# Altium PCB SPI_Board.PcbDoc (part 2 of 2)
Units mil, origin at the board's own origin, x right, y up, seen from the top; angles counter-clockwise.
Board outline 3600 x 5100 mil, 2 copper layers (Top Layer, Bottom Layer); 50 components, 221 nets, 541 pads, 190 vias.
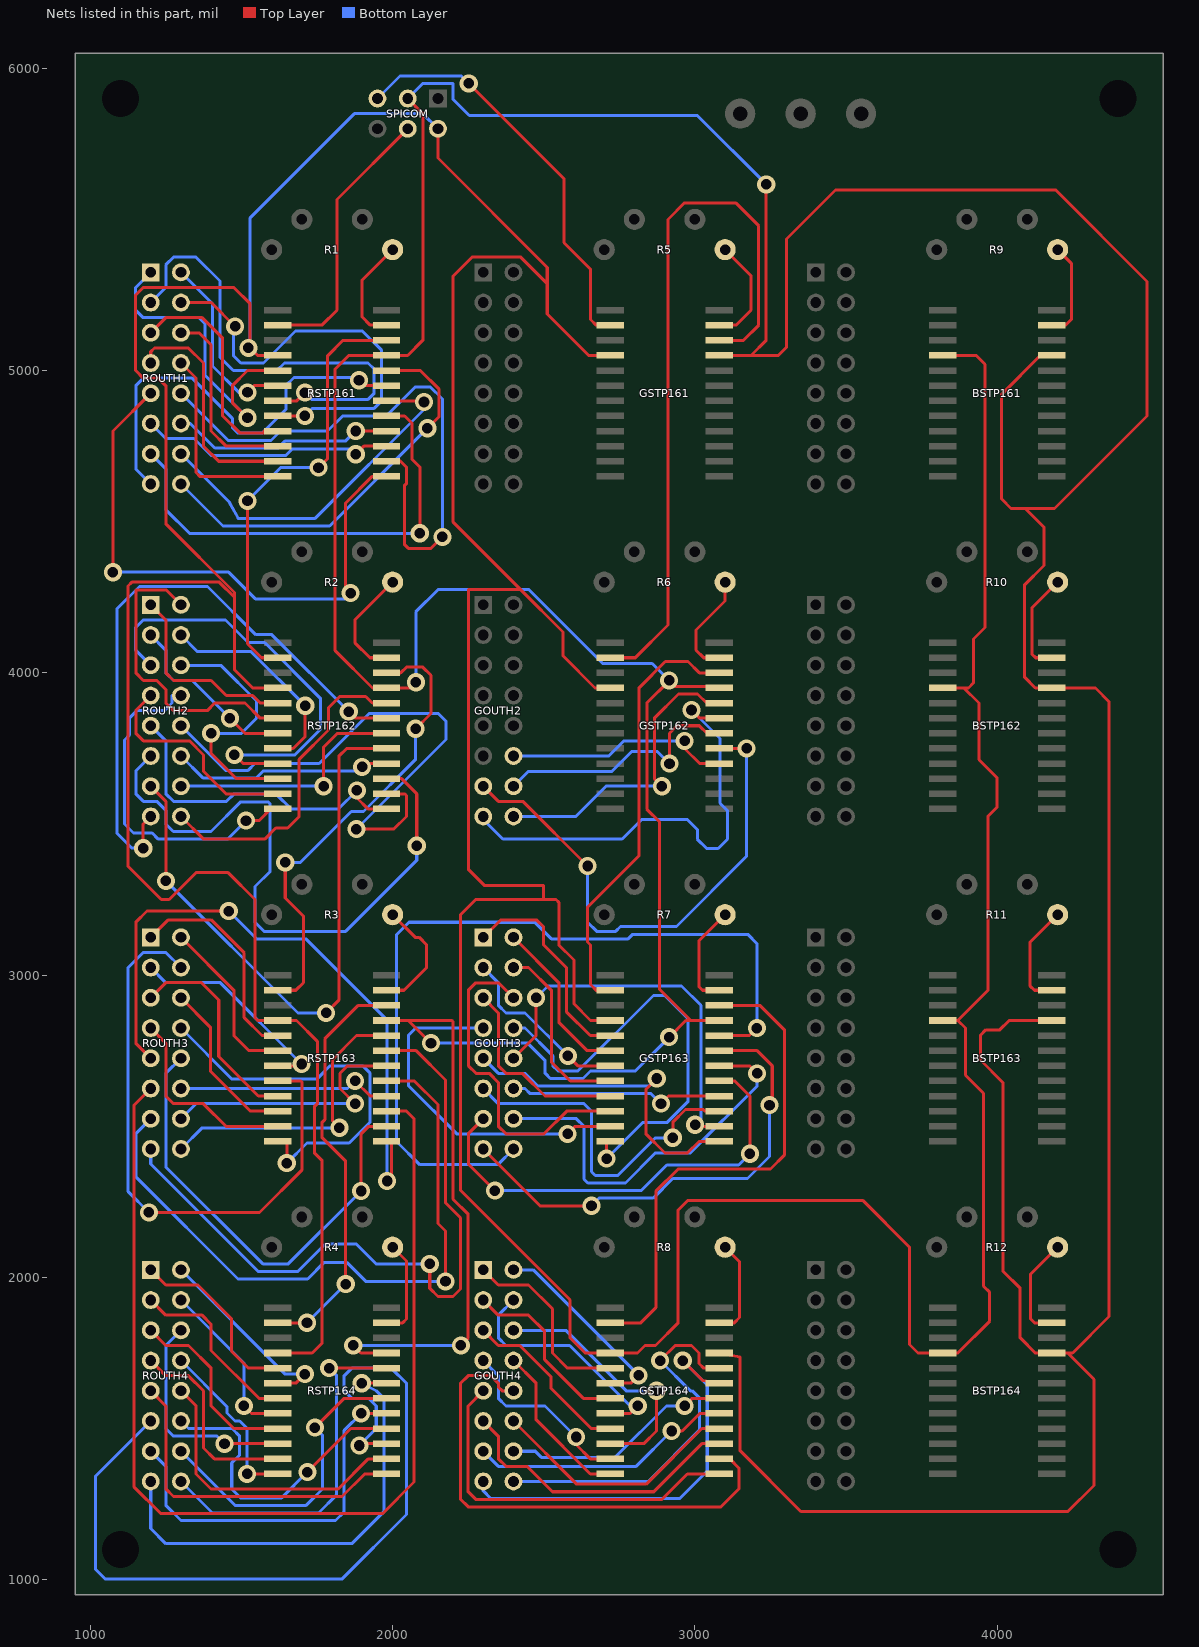
[diagram p2: the nets of this part, all layers, seen from the top]

## Via types
v1: diameter 60, hole 35, Top Layer to Bottom Layer, 190 vias

## Nets (pads, with @x,y where several pads share a name; then routed paths per layer and width w, separated by ;. In a path a pad name is that pad's centre, name@x,y a point inside that pad or via, vN(x,y) a via of type N, cw(c..) or ccw(c..) an arc to the next point about the centre after c; other vN are vias at no path point) (continued)
GOUT27: GOUTH2.12 GSTP162.16 | length 746.5
  Top Layer w10: v1(2966,3775) 2966,3750 3016,3700 GSTP162.16@3080.12,3700
  Bottom Layer w10: GOUTH2.12@2400,3725 2715.25,3725 2765.25,3775 v1(2966,3775)
GOUT28: GOUTH2.13 GSTP162.17 | length 1729.4
  Top Layer w10: GOUTH2.13@2300,3625 2350,3575 2431,3575 v1(2645,3361) ; GSTP162.17@3080.12,3750 v1(3171,3750)
  Bottom Layer w10: v1(2645,3361) 2645,3175 2675,3145 2738,3145 2754,3161 2939,3161 3171,3393 v1(3171,3750)
GOUT29: GOUTH2.14 GSTP162.18 | length 865
  Top Layer w10: v1(2916,3700) 2916,3800 2941,3825 3015,3825 3040,3800 GSTP162.18@3080.12,3800
  Bottom Layer w10: GOUTH2.14@2400,3625 2448,3673 2724,3673 2791,3740 2876,3740 v1(2916,3700)
GOUT30: GOUTH2.15 GSTP162.19 | length 1521.3
  Top Layer w10: v1(2989,3877) 3016,3850 GSTP162.19@3080.12,3850
  Bottom Layer w10: GOUTH2.15@2300,3525 2300,3515.12 2364.64,3450.47 2759.47,3450.47 2824,3515 2975,3515 3008,3482 3008,3450 3039,3419 3077,3419 3108,3450 3108,3544 3083,3569 3083,3783 v1(2989,3877)
GOUT31: GOUTH2.16 GSTP162.20 | length 1027.5
  Top Layer w10: v1(2891,3625) 2866,3650 2866,3850 2946,3930 3009,3930 3039,3900 GSTP162.20@3080.12,3900
  Bottom Layer w10: GOUTH2.16@2400,3525 2606,3525 2706,3625 v1(2891,3625)
GOUT32: GOUTH3.1 GSTP163.5 | length 721.8
  Top Layer w10: GOUTH3.1@2300,3125 2357,3182 2477,3182 2500,3159 2500,3100 2575,3025 2575,2879 2654,2800 GSTP163.5@2719.88,2800
GOUT33: GOUTH3.2 GSTP163.6 | length 552.1
  Top Layer w10: GOUTH3.2@2400,3125 2550,2975 2550,2843.7 2643.7,2750 GSTP163.6@2719.88,2750
GOUT34: GOUTH3.3 GSTP163.7 | length 598.4
  Top Layer w10: v1(2580,2733) 2613,2700 GSTP163.7@2719.88,2700
  Bottom Layer w10: GOUTH3.3@2300,3025 2350,2975 2350,2900 2375,2875 2438,2875 v1(2580,2733)
GOUT35: GOUTH3.4 GSTP163.8 | length 614
  Top Layer w10: GOUTH3.4@2400,3025 2450,3025 2525,2950 2525,2713 2588,2650 GSTP163.8@2719.88,2650
GOUT36: GOUTH3.5 GSTP163.9 | length 657
  Top Layer w10: GOUTH3.5@2300,2925 2350,2875 2350,2700 2375,2675 2429,2675 2504,2600 GSTP163.9@2719.88,2600
GOUT37: GOUTH3.6 GSTP163.10 | length 1108.5
  Top Layer w10: GOUTH3.6@2400,2925 2350.47,2974.53 2275,2974.53 2250.47,2950 2250.47,2700.53 2276,2675 2320.04,2675 2350,2645.04 2350,2500 2375,2475 2501,2475 2576,2550 GSTP163.10@2719.88,2550
GOUT38: GOUTH3.7 GSTP163.11 | length 1167.9
  Top Layer w10: v1(2579,2475) 2604,2500 GSTP163.11@2719.88,2500
  Bottom Layer w10: GOUTH3.7@2300,2825 2077,2825 2052,2800 2052,2635 2212,2475 v1(2579,2475)
GOUT39: GOUTH3.8 GSTP163.12 | length 1481.7
  Top Layer w10: v1(2708,2393) 2708,2450 GSTP163.12@2719.88,2450
  Bottom Layer w10: GOUTH3.8@2400,2825 2438,2825 2530,2733 2530,2700 2547,2683 2613,2683 2863,2933 2900,2933 2978,2855 2978,2582.83 2907.17,2512 2827,2512 v1(2708,2393)
GOUT40: GOUTH3.9 GSTP163.13 | length 1104.6
  Top Layer w10: v1(2874,2658) 2838,2622 2838,2475.12 2901.51,2411.62 2975,2411.62 3013.38,2450 GSTP163.13@3080.12,2450
  Bottom Layer w10: GOUTH3.9@2300,2725 2350,2675 2438,2675 2480,2633 2849,2633 v1(2874,2658)
GOUT41: GOUTH3.10 GSTP163.14 | length 1302.8
  Top Layer w10: GOUTH3.10@2400,2725 2475,2800 v1(2475,2925) ; v1(3001,2505) 3006,2500 GSTP163.14@3080.12,2500
  Bottom Layer w10: v1(2475,2925) 2514,2964 2956,2964 3020,2900 3020,2524 v1(3001,2505)
GOUT42: GOUTH3.11 GSTP163.15 | length 1139.6
  Top Layer w10: v1(2927,2462) 2927,2513.5 2969.33,2555.83 3028.17,2555.83 3034,2550 GSTP163.15@3080.12,2550
  Bottom Layer w10: GOUTH3.11@2300,2625 2350,2575 2633,2575 2658,2550 2658,2350 2670.78,2337.22 2745.33,2337.22 2870.11,2462 v1(2927,2462)
GOUT43: GOUTH3.12 GSTP163.16 | length 711.2
  Top Layer w10: v1(2888,2575) 2913,2600 GSTP163.16@3080.12,2600
  Bottom Layer w10: GOUTH3.12@2400,2625 2438,2625 2455,2608 2855,2608 v1(2888,2575)
GOUT44: GOUTH3.13 GSTP163.17 | length 1502.4
  Top Layer w10: GOUTH3.13@2300,2525 2250.47,2475.47 2250.47,2375 v1(2338.25,2287.22) ; GSTP163.17@3080.12,2650 3132,2650 3182,2600 v1(3182,2409)
  Bottom Layer w10: v1(2338.25,2287.22) 2822.67,2287.22 2907.32,2371.87 3144.87,2371.87 v1(3182,2409)
GOUT45: GOUTH3.14 GSTP163.18 | length 1307.8
  Top Layer w10: GSTP163.18@3080.12,2700 3181,2700 v1(3206,2675)
  Bottom Layer w10: GOUTH3.14@2400,2525 2608,2525 2633,2500 2633,2325 2645.78,2312.22 2770.22,2312.22 2870,2412 2985,2412 3206,2633 v1(3206,2675)
GOUT46: GOUTH3.15 GSTP163.19 | length 1592.7
  Top Layer w10: GOUTH3.15@2300,2425 2488,2237 v1(2658,2237) ; GSTP163.19@3080.12,2750 3206,2750 3256,2700 3256,2579 v1(3247,2570)
  Bottom Layer w10: v1(2658,2237) 2683.22,2262.22 2862.22,2262.22 2927,2327 3174,2327 3247,2400 v1(3247,2570)
GOUT47: GOUTH3.16 GSTP163.20 | length 2790.1
  Top Layer w10: GSTP163.20@3080.12,2800 3180,2800 v1(3205,2825)
  Bottom Layer w10: GOUTH3.16@2400,2425 2348,2373 2090,2373 2013,2450 2013,3134 2054,3175 2470,3175 2525,3120 2779.29,3120 2794.29,3135 3175,3135 3205,3105 v1(3205,2825)
GOUT48: GOUTH4.1 GSTP164.5 | length 640
  Top Layer w10: GOUTH4.1@2300,2025 2350,1975 2450,1975 2529,1896 2529,1750 2579,1700 GSTP164.5@2719.88,1700
GOUT49: GOUTH4.2 GSTP164.6 | length 663.4
  Top Layer w10: GSTP164.6@2719.88,1650 2788,1650 v1(2814,1676)
  Bottom Layer w10: GOUTH4.2@2400,2025 2465,2025 v1(2814,1676)
GOUT50: GOUTH4.3 GSTP164.7 | length 609.6
  Top Layer w10: GOUTH4.3@2300,1925 2350,1875 2450,1875 2503.15,1821.85 2503.15,1727.85 2631,1600 GSTP164.7@2719.88,1600
GOUT51: GOUTH4.4 GSTP164.8 | length 801.4
  Top Layer w10: GSTP164.8@2719.88,1550 2786,1550 v1(2811,1575)
  Bottom Layer w10: GOUTH4.4@2400,1925 2350,1875 2350,1800 2375,1775 2586,1775 2786,1575 v1(2811,1575)
GOUT52: GOUTH4.5 GSTP164.9 | length 577.1
  Top Layer w10: GOUTH4.5@2300,1825 2350,1775 2420.64,1775 2524.73,1670.91 2524.73,1632.27 2657,1500 GSTP164.9@2719.88,1500
GOUT53: GOUTH4.6 GSTP164.10 | length 859.4
  Top Layer w10: GSTP164.10@2719.88,1450 2831,1450 2873,1492 v1(2873,1625)
  Bottom Layer w10: GOUTH4.6@2400,1825 2573,1825 2773,1625 v1(2873,1625)
GOUT54: GOUTH4.7 GSTP164.11 | length 613.1
  Top Layer w10: v1(2607,1472) 2607,1447 2654,1400 GSTP164.11@2719.88,1400
  Bottom Layer w10: GOUTH4.7@2300,1725 2350,1675 2350,1600 2375,1575 2504,1575 v1(2607,1472)
GOUT55: GOUTH4.8 GSTP164.12 | length 546.1
  Top Layer w10: GOUTH4.8@2400,1725 2475,1650 2475,1529 2654,1350 GSTP164.12@2719.88,1350
GOUT56: GOUTH4.9 GSTP164.13 | length 1230
  Top Layer w10: GOUTH4.9@2300,1625 2250,1575 2250,1291 2275,1266 2891,1266 2975,1350 GSTP164.13@3080.12,1350
GOUT57: GOUTH4.10 GSTP164.14 | length 1700
  Top Layer w10: GOUTH4.10@2400,1625 2362.5,1625 2350,1637.5 2350,1650 2325,1675 2250,1675 2225,1650 2225,1266 2250,1241 3086.39,1241 3145.39,1300 3145.39,1369.61 3115,1400 GSTP164.14@3080.12,1400
GOUT58: GOUTH4.11 GSTP164.15 | length 986.8
  Top Layer w10: GOUTH4.11@2300,1525 2350,1475 2350,1400 2375,1375 2445,1375 2529,1291 2864,1291 3023,1450 GSTP164.15@3080.12,1450
GOUT59: GOUTH4.12 GSTP164.16 | length 842.9
  Top Layer w10: GOUTH4.12@2400,1525 2609,1316 2839,1316 3023,1500 GSTP164.16@3080.12,1500
GOUT60: GOUTH4.13 GSTP164.17 | length 873.3
  Top Layer w10: v1(2923,1492) 2958,1492 3016,1550 GSTP164.17@3080.12,1550
  Bottom Layer w10: GOUTH4.13@2300,1425 2350,1375 2806,1375 v1(2923,1492)
GOUT61: GOUTH4.14 GSTP164.18 | length 769.2
  Top Layer w10: v1(2966,1575) 2991,1600 GSTP164.18@3080.12,1600
  Bottom Layer w10: GOUTH4.14@2400,1425 2472,1425 2492,1405 2736,1405 2906,1575 v1(2966,1575)
GOUT62: GOUTH4.15 GSTP164.19 | length 1366.8
  Top Layer w10: v1(2960,1725) 3026,1659 GSTP164.19@3080.12,1650
  Bottom Layer w10: GOUTH4.15@2300,1325 2300,1294 2325,1269 2950,1269 3041,1360 3041,1644 v1(2960,1725)
GOUT63: GOUTH4.16 GSTP164.20 | length 1241
  Top Layer w10: v1(2885,1725) 2935,1775 2989,1775 3014,1750 3014,1715 3029,1700 GSTP164.20@3080.12,1700
  Bottom Layer w10: GOUTH4.16@2400,1325 2845,1325 3016,1496 3016,1600 2991,1625 2985,1625 v1(2885,1725)
GREENSPI: GSTP161.2 SPICOM.5 | length 1363.9
  Top Layer w10: v1(2252,5950) 2567,5635 2567,5423 2654.61,5335.39 2654.61,5169 2673.61,5150 GSTP161.2@2719.88,5150
  Bottom Layer w10: SPICOM.5@1950,5900 2024.53,5974.53 2227.47,5974.53 v1(2252,5950)
GREENSPIOUT1: GSTP161.22 GSTP162.2 | length 2412.7
  Top Layer w10: GSTP162.2@2719.88,4050 2803,4050 2911,4158 2911,5500 2966,5555 3135,5555 3211,5479 3211,5150 3161,5100 GSTP161.22@3080.12,5100
GREENSPIOUT2: GSTP162.22 GSTP163.2 | length 1445.4
  Top Layer w10: GSTP163.2@2719.88,2950 2673.61,2950 2654.61,2969 2654.61,3100 2645,3109.61 2645,3225 2816,3396 2816,3951 2902.5,4037.5 2977.5,4037.5 3015,4000 GSTP162.22@3080.12,4000
GREENSPIOUT3: GSTP163.22 GSTP164.2 | length 1695.8
  Top Layer w10: GSTP164.2@2719.88,1850 2821,1850 2871,1900 2871,2285 2945,2359 3250,2359 3297,2406 3297,2818 3215,2900 GSTP163.22@3080.12,2900
LATCH: BSTP161.4 BSTP162.4 BSTP163.4 BSTP164.4 GSTP161.4 GSTP162.4 GSTP163.4 GSTP164.4 RSTP161.4 RSTP162.4 RSTP163.4 RSTP164.4 SPICOM.2 | length 19822.2
  Top Layer w10: v1(1523,5075) v1@1529,5075 ; RSTP164.4@1619.88,1750 1734,1750 1767,1783 1767,2386 1741,2412 1741,2565 1751,2575 1751,2781 1682,2850 RSTP163.4@1619.88,2850 1554,2850 1545,2859 1545,3250 1456,3339 1350,3339 1261,3250 1235,3250 1125,3360 1125,4287.5 1137.5,4300 1427,4300 1477,4250 ; RSTP162.4@1619.88,3950 1537,3950 1477,4010 1477,4250 ; RSTP161.4@1619.88,5050 1554,5050 v1@1529,5075 ; SPICOM.2@2150,5800 2150,5703 2511.72,5341.28 2511.72,5287.28 ; GSTP163.4@2719.88,2850 2655,2850 2600,2905 2600,3050 2550,3100 2550,3241 2541,3250 2500,3250 ; GSTP162.4@2719.88,3950 2670,3950 2563.68,4056.32 2563.68,4135.32 2424,4275 ; GSTP161.4@2719.88,5050 2649,5050 2511.72,5187.28 2511.72,5287.28 ; BSTP163.4@3819.88,2850 3870,2850 ; BSTP162.4@3819.88,3950 3890,3950 ; BSTP161.4@3819.88,5050 3931,5050 3960.16,5020.84 3960.16,4150 3922,4111.84 3922,3967 3905,3950 3890,3950 ; 1477,4250 1477,4266 1250,4493 1250,4950 1225,4975 1175,4975 1150,5000 1150,5250 1175,5275 1475,5275 1529,5221 v1@1529,5075 ; 2424,4275 2200.47,4498.53 2200.47,5312.97 2262.5,5375 2424,5375 2511.72,5287.28 ; 2424,4275 2250.47,4275 2250.47,3350 2304.47,3296 2500,3296 2500,3250 ; 2500,3250 2275,3250 2225,3200 2225,2288 2587,1926 2587,1800 2637,1750 GSTP164.4@2719.88,1750 2810,1750 2835,1775 2870,1775 2945,1850 2945,2222.78 2977.22,2255 3555,2255 3710,2100 3710,1778 3738,1750 BSTP164.4@3819.88,1750 3870,1750 3975.46,1855.46 3975.46,1950.74 3955,1971.2 3955,2609 3895,2669 3895,2825 3870,2850 ; 3870,2850 3969,2949 3969,3524.9 3999,3554.9 3999,3654 3940,3713 3940,3900 3890,3950
  Bottom Layer w10: v1(1523,5075) 1529,5081 1529,5505.46 1873.54,5850 2100,5850 SPICOM.2@2150,5800
NetBSTP161_23: BSTP161.23 R9.1 | length 322.9
  Top Layer w10: BSTP161.23@4180.12,5150 4226.39,5150 4245.39,5169 4245.39,5354.61 R9.1@4200,5400
NetBSTP162_23: BSTP162.23 R10.1 | length 343.2
  Top Layer w10: BSTP162.23@4180.12,4050 4127.34,4050 4114.84,4062.5 4114.84,4214.84 R10.1@4200,4300
NetBSTP163_23: BSTP163.23 R11.1 | length 350.9
  Top Layer w10: BSTP163.23@4180.12,2950 4123.5,2950 4108.33,2965.17 4108.33,3108.33 R11.1@4200,3200
NetBSTP164_23: BSTP164.23 R12.1 | length 348.7
  Top Layer w10: BSTP164.23@4180.12,1850 4123.5,1850 4111,1862.5 4111,2011 R12.1@4200,2100
NetGSTP161_23: GSTP161.23 R5.1 | length 362.2
  Top Layer w10: GSTP161.23@3080.12,5150 3136,5150 3186,5200 3186,5314 R5.1@3100,5400
NetGSTP162_23: GSTP162.23 R6.1 | length 351.2
  Top Layer w10: GSTP162.23@3080.12,4050 3029,4050 3004,4075 3004,4142 3100,4238 R6.1@3100,4300
NetGSTP163_23: GSTP163.23 R7.1 | length 345.8
  Top Layer w10: GSTP163.23@3080.12,2950 3025.5,2950 3013,2962.5 3013,3113 R7.1@3100,3200
NetGSTP164_23: GSTP164.23 R8.1 | length 327.5
  Top Layer w10: GSTP164.23@3080.12,1850 3130.5,1850 3148,1867.5 3148,2052 R8.1@3100,2100
NetR1_1: R1.1 RSTP161.23 | length 357
  Top Layer w10: RSTP161.23@1980.12,5150 1926.5,5150 1898.82,5177.68 1898.82,5298.82 R1.1@2000,5400
NetR2_1: R2.1 RSTP162.23 | length 377.6
  Top Layer w10: RSTP162.23@1980.12,4050 1925,4050 1875,4100 1875,4175 R2.1@2000,4300
NetR3_1: R3.1 RSTP163.23 | length 393.4
  Top Layer w10: RSTP163.23@1980.12,2950 2038,2950 2113,3025 2113,3100 2088,3125 2075,3125 R3.1@2000,3200
NetR4_1: R4.1 RSTP164.23 | length 327.6
  Top Layer w10: RSTP164.23@1980.12,1850 2033.5,1850 2046,1862.5 2046,2054 R4.1@2000,2100
OENABLE: BSTP161.21 BSTP162.21 BSTP163.21 BSTP164.21 GSTP161.21 GSTP162.21 GSTP163.21 GSTP164.21 RSTP161.21 RSTP162.21 RSTP163.21 RSTP164.21 SPICOM.3 | length 20389.2
  Top Layer w10: v1(1870,1775) 1895,1750 RSTP164.21@1980.12,1750 ; RSTP163.21@1980.12,2850 2052,2850 ; SPICOM.3@2050,5900 2100,5850 2100,5100 2050,5050 RSTP161.21@1980.12,5050 1855,5050 1810.16,5005.16 1810.16,4073.49 1933.64,3950 RSTP162.21@1980.12,3950 2058,3950 v1(2077,3969) ; v1(2127,2775) 2052,2850 ; v1(2226,1775) 2250,1799 2250,2209 2200,2259 2200,2847 2197,2850 2052,2850 ; v1(2915,2795) 2970,2850 2986,2850 ; GSTP164.21@3080.12,1750 3150,1737.5 3150,1426.22 3350.75,1225.47 4233.87,1225.47 4320.39,1312 4320.39,1663.11 4233.5,1750 ; GSTP163.21@3080.12,2850 2986,2850 ; GSTP162.21@3080.12,3950 3049.52,3950 3049.52,3955.47 2934.53,3955.47 v1(2915,3975) 2915,3974 2841,3900 2841,3549 2883,3507 2883,2953 2986,2850 ; GSTP161.21@3080.12,5050 3186,5050 ; v1(3236,5616) 3236,5100 3186,5050 ; BSTP163.21@4180.12,2850 4040,2850 4009,2819 3962.5,2819 3945,2801.5 3945,2719 4019,2645 4019,2021.2 4076,1964.2 4076,1800 4126,1750 BSTP164.21@4180.12,1750 4233.5,1750 ; BSTP161.21@4180.12,5050 4143,5050 4014.84,4921.84 4014.84,4575 4045.84,4544 4093,4544 ; 3186,5050 3276,5050 3303,5077 3303,5435 3465,5597 4194,5597 4496,5295 4496,4850 4190,4544 4093,4544 ; 4093,4544 4155,4482 4155,4355 4089.84,4289.84 4089.84,3986.66 4126.5,3950 BSTP162.21@4180.12,3950 4325.15,3950 4370.39,3904.76 4370.39,1870.39 4250,1750 4233.5,1750
  Bottom Layer w10: v1(1870,1775) v1(2226,1775) ; SPICOM.3@2050,5900 2099.53,5949.53 2199.53,5949.53 2199.53,5898.47 2254,5844 3008,5844 v1(3236,5616) ; v1(2077,3969) 2077,4202 2150,4275 2451,4275 2695,4031 2859,4031 v1(2915,3975) ; v1(2127,2775) 2447,2775 2505,2717 2505,2675 2522,2658 2630,2658 2655,2683 2803,2683 v1(2915,2795)
REDSPI: RSTP161.2 SPICOM.4 | length 913.8
  Top Layer w10: RSTP161.2@1619.88,5150 1766,5150 1816,5200 1816,5566 SPICOM.4@2050,5800
REDSPIOUT1: RSTP161.22 RSTP162.2 | length 1470.9
  Top Layer w10: v1(1520,4569) 1520,4096.5 1566.5,4050 RSTP162.2@1619.88,4050 ; v1(1755,4679) 1785.16,4709.16 1785.16,5049.16 1836,5100 RSTP161.22@1980.12,5100
  Bottom Layer w10: v1(1520,4569) 1630,4679 v1(1755,4679)
REDSPIOUT2: RSTP162.22 RSTP163.2 | length 1555.6
  Top Layer w10: RSTP163.2@1619.88,2950 1680,2950 1705,2975 1705,3195 1645,3255 v1(1645,3372.98) ; RSTP162.22@1980.12,4000 2027,4000 2046,4019 2100,4019 2127,3992 2127,3865.79 v1(2076.21,3815)
  Bottom Layer w10: v1(1645,3372.98) 1694.98,3372.98 1863.67,3541.67 1903.67,3541.67 2076.21,3714.21 v1(2076.21,3815)
REDSPIOUT3: RSTP163.22 RSTP164.2 | length 1376.2
  Top Layer w10: RSTP164.2@1619.88,1850 v1(1717,1850) ; v1(1845,1978) 1845,2384.52 1766.07,2463.45 1766.07,2511.98 1776,2521.91 1776,2789.34 1886.66,2900 RSTP163.22@1980.12,2900
  Bottom Layer w10: v1(1717,1850) v1(1845,1978)
ROUT0: ROUTH1.1 RSTP161.5 | length 1060.6
  Top Layer w10: v1(1520,4844) 1470,4894 1470,4950 1520,5000 RSTP161.5@1619.88,5000
  Bottom Layer w10: ROUTH1.1@1200,5325 1150,5275 1150,5200 1175,5175 1360,5175 1378.95,5156.05 1378.95,4985.05 v1(1520,4844)
ROUT1: ROUTH1.2 RSTP161.6 | length 614.3
  Top Layer w10: v1(1520,4928) 1542,4950 RSTP161.6@1619.88,4950
  Bottom Layer w10: ROUTH1.2@1300,5325 1403.95,5221.05 1403.95,5014.8 1490.75,4928 v1(1520,4928)
ROUT2: ROUTH1.3 RSTP161.7 | length 1595.4
  Top Layer w10: RSTP161.7@1619.88,4900 1683,4900 v1(1710,4927)
  Bottom Layer w10: ROUTH1.3@1200,5225 1250,5275 1250,5350 1275,5375 1350,5375 1428.95,5296.05 1428.95,5044.05 1473,5000 1617.17,5000 1642.17,5025 1919,5025 1939,5005 1939,4925 1917.71,4903.71 1733.29,4903.71 v1(1710,4927)
ROUT3: ROUTH1.4 RSTP161.8 | length 1413.8
  Top Layer w10: ROUTH1.4@1300,5225 1400,5225 v1(1479,5146) ; RSTP161.8@1619.88,4850 v1(1710,4850)
  Bottom Layer w10: v1(1479,5146) 1473,5140 1473,5050 1498,5025 1573,5025 1679,5131 1900,5131 1964,5067 1964,4900 1939,4875 1735,4875 v1(1710,4850)
ROUT4: ROUTH1.5 RSTP161.9 | length 755
  Top Layer w10: ROUTH1.5@1200,5125 1250,5175 1370,5175 1438,5107 1438,4850 1494,4794 1575,4794 1575,4800 RSTP161.9@1619.88,4800
ROUT5: ROUTH1.6 RSTP161.10 | length 642.2
  Top Layer w10: ROUTH1.6@1300,5125 1359.6,5125 1399.53,5085.08 1399.53,4800 1449.53,4750 RSTP161.10@1619.88,4750
ROUT6: ROUTH1.7 RSTP161.11 | length 779
  Top Layer w10: ROUTH1.7@1200,5025 1200,5062.5 1212.5,5075 1324.53,5075 1374.53,5025 1374.53,4750 1424.53,4700 RSTP161.11@1619.88,4700
ROUT7: ROUTH1.8 RSTP161.12 | length 658.5
  Top Layer w10: ROUTH1.8@1300,5025 1349.53,4975.47 1349.53,4662.5 1362.03,4650 RSTP161.12@1619.88,4650
ROUT8: ROUTH1.9 RSTP161.13 | length 1950.3
  Top Layer w10: v1(1075,4333) 1075,4800 ROUTH1.9@1200,4925 ; v1(1861,4264) 1845,4280 1845,4562 1933,4650 RSTP161.13@1980.12,4650
  Bottom Layer w10: v1(1075,4333) 1458,4333 1546,4245 1842,4245 v1(1861,4264)
ROUT9: ROUTH1.10 RSTP161.14 | length 1954.4
  Top Layer w10: RSTP161.14@1980.12,4700 2026.39,4700 2045.39,4681 2045.39,4625.39 2039,4619 2039,4425 2052,4412 2127,4412 v1(2165,4450)
  Bottom Layer w10: ROUTH1.10@1300,4925 1456,4769 1598,4769 1629,4800 1785,4800 1835,4850 1979,4850 2075,4946 2125,4946 2165,4906 v1(2165,4450)
ROUT10: ROUTH1.11 RSTP161.15 | length 851.8
  Top Layer w10: v1(1878,4723) 1905,4750 RSTP161.15@1980.12,4750
  Bottom Layer w10: ROUTH1.11@1200,4825 1250,4775 1343,4775 1399,4719 1647,4719 1669,4741 1860,4741 v1(1878,4723)
ROUT11: ROUTH1.12 RSTP161.16 | length 736.9
  Top Layer w10: v1(1878,4800) RSTP161.16@1980.12,4800
  Bottom Layer w10: ROUTH1.12@1300,4825 1331.16,4825 1412.16,4744 1621.79,4744 1645.21,4767.42 1845.42,4767.42 v1(1878,4800)
ROUT12: ROUTH1.13 RSTP161.17 | length 1547.4
  Top Layer w10: RSTP161.17@1980.12,4850 2040,4850 2065,4825 2065,4705.83 2090,4680.83 v1(2090,4462)
  Bottom Layer w10: ROUTH1.13@1200,4725 1250,4675 1250,4540 1329,4461 2089,4461 v1(2090,4462)
ROUT13: ROUTH1.14 RSTP161.18 | length 1202.1
  Top Layer w10: RSTP161.18@1980.12,4900 2100,4900 v1(2104,4896)
  Bottom Layer w10: ROUTH1.14@1300,4725 1459.19,4565.81 1489.14,4511 1744,4511 2104,4871 v1(2104,4896)
ROUT14: ROUTH1.15 RSTP161.19 | length 1411.6
  Top Layer w10: v1(1889,4968) 1907,4950 RSTP161.19@1980.12,4950
  Bottom Layer w10: ROUTH1.15@1200,4625 1150.47,4674.53 1150.47,4950 1175.47,4975 1337.01,4975 1470,4842.01 1470,4811.5 1487.5,4794 1570,4794 1647,4871 1647,4950 1674,4977 1880,4977 v1(1889,4968)
ROUT15: ROUTH1.16 RSTP161.20 | length 1351.1
  Top Layer w10: RSTP161.20@1980.12,5000 2092,5000 2154,4938 2154,4848 v1(2115,4809)
  Bottom Layer w10: ROUTH1.16@1300,4625 1439,4486 1792,4486 v1(2115,4809)
ROUT16: ROUTH2.1 RSTP162.5 | length 657
  Top Layer w10: ROUTH2.1@1200,4225 1250,4175 1250,4000 1275,3975 1400,3975 1450,3925 1537,3925 1562,3900 RSTP162.5@1619.88,3900
ROUT17: ROUTH2.2 RSTP162.6 | length 1023.2
  Top Layer w10: ROUTH2.2@1300,4225 1250.47,4274.53 1150.47,4274.53 1150.47,4000 1175.47,3975 1220.04,3975 1250,3945.04 1250,3900 1275,3875 1387,3875 1412,3900 1512,3900 1562,3850 RSTP162.6@1619.88,3850
ROUT18: ROUTH2.3 RSTP162.7 | length 598.4
  Top Layer w10: v1(1462,3850) 1512,3800 RSTP162.7@1619.88,3800
  Bottom Layer w10: ROUTH2.3@1200,4125 1250,4075 1250,4000 1275,3975 1337,3975 v1(1462,3850)
ROUT19: ROUTH2.4 RSTP162.8 | length 716.7
  Top Layer w10: RSTP162.8@1619.88,3750 1671.2,3750 1711,3789.8 v1(1711,3891)
  Bottom Layer w10: ROUTH2.4@1300,4125 1355,4070 1532,4070 v1(1711,3891)
ROUT20: ROUTH2.5 RSTP162.9 | length 1451.6
  Top Layer w10: v1(1476.94,3728.65) 1505.59,3700 RSTP162.9@1619.88,3700
  Bottom Layer w10: ROUTH2.5@1200,4025 1150,4075 1150,4150 1175,4175 1447.36,4175 1521.74,4100.62 1576.71,4100.62 1761,3916.33 1761,3812.5 1677.15,3728.65 v1(1476.94,3728.65)
ROUT21: ROUTH2.6 RSTP162.10 | length 848
  Top Layer w10: v1(1399.53,3800) 1399.53,3734.34 1483.86,3650 RSTP162.10@1619.88,3650
  Bottom Layer w10: ROUTH2.6@1300,4025 1432,4025 1550,3907 1550,3850 1500,3800 v1(1399.53,3800)
ROUT22: ROUTH2.7 RSTP162.11 | length 729.6
  Top Layer w10: ROUTH2.7@1200,3925 1150.47,3875.47 1150.47,3800 1175.47,3775 1328,3775 1374.53,3728.47 1374.53,3674.19 1448.71,3600 RSTP162.11@1619.88,3600
ROUT23: ROUTH2.8 RSTP162.12 | length 1142.4
  Top Layer w10: v1(1515,3511) 1558,3511 1597,3550 RSTP162.12@1619.88,3550
  Bottom Layer w10: ROUTH2.8@1300,3925 1270,3925 1270,3900 1245,3875 1154,3875 1129,3850 1129,3794 1113,3778 1113,3500 1142.71,3470.29 1204.71,3470.29 1225,3450 1454,3450 v1(1515,3511)
ROUT24: ROUTH2.9 RSTP162.13 | length 1081.2
  Top Layer w10: v1(1882,3611) 1882,3586 1918,3550 RSTP162.13@1980.12,3550
  Bottom Layer w10: ROUTH2.9@1200,3825 1250,3775 1250,3600 1275,3575 1450.71,3575 1474.21,3598.5 1615.55,3598.5 1664.05,3550 1821,3550 v1(1882,3611)
ROUT25: ROUTH2.10 RSTP162.14 | length 1825.7
  Top Layer w10: v1(1880.53,3483.18) 2004.18,3483.18 2046,3525 2046,3594 2040,3600 RSTP162.14@1980.12,3600
  Bottom Layer w10: ROUTH2.10@1300,3825 1447.25,3677.75 1522.31,3677.75 1544.56,3700 1757,3700 1922,3865 2152,3865 2177,3840 2177,3779.64 v1(1880.53,3483.18)
ROUT26: ROUTH2.11 RSTP162.15 | length 2108.8
  Top Layer w10: RSTP162.15@1980.12,3650 2030,3650 2080,3600 v1(2080,3428)
  Bottom Layer w10: ROUTH2.11@1200,3725 1150.47,3675.47 1150.47,3600 1175.47,3575 1220.04,3575 1250,3545.04 1250,3500 1274.53,3475.47 1399.47,3475.47 1497.5,3573.5 1587.5,3573.5 1595,3566 1595,3343 1545,3293 1545,3175 1575,3145 1845,3145 2080,3380 v1(2080,3428)
ROUT27: ROUTH2.12 RSTP162.16 | length 729.6
  Top Layer w10: v1(1899.12,3689.12) 1910,3700 RSTP162.16@1980.12,3700
  Bottom Layer w10: ROUTH2.12@1300,3725 1372.25,3652.75 1549.79,3652.75 1572.05,3675 1885,3675 v1(1899.12,3689.12)
ROUT28: ROUTH2.13 RSTP162.17 | length 2080
  Top Layer w10: ROUTH2.13@1200,3625 1250,3575 v1(1250,3312) ; v1(1780,2875) 1822.37,2917.37 1822.37,3724.37 1848,3750 RSTP162.17@1980.12,3750
  Bottom Layer w10: v1(1250,3312) 1687,2875 v1(1780,2875)
ROUT29: ROUTH2.14 RSTP162.18 | length 828.4
  Top Layer w10: v1(1772,3625) 1772,3754.41 1817.59,3800 RSTP162.18@1980.12,3800
  Bottom Layer w10: ROUTH2.14@1300,3625 v1(1772,3625)
ROUT30: ROUTH2.15 RSTP162.19 | length 2067.8
  Top Layer w10: v1(1175,3420) 1175,3500 ROUTH2.15@1200,3525 ; v1(1855.17,3871.83) 1877,3850 RSTP162.19@1980.12,3850
  Bottom Layer w10: v1(1175,3420) 1138,3420 1088,3470 1088,4211 1163,4286 1387.82,4286 1547.47,4126.35 1600.65,4126.35 v1(1855.17,3871.83)
ROUT31: ROUTH2.16 RSTP162.20 | length 1069.9
  Top Layer w10: ROUTH2.16@1300,3525 1375,3450 1577,3450 1614,3487 1653,3487 1691,3525 1691,3714 1788,3811 1788,3885 1825,3922 1911.2,3922 1933.2,3900 RSTP162.20@1980.12,3900
ROUT32: ROUTH3.1 RSTP163.5 | length 728.3
  Top Layer w10: ROUTH3.1@1200,3125 1258,3183 1400,3183 1509,3074 1509,2859.37 1568.37,2800 RSTP163.5@1619.88,2800
ROUT33: ROUTH3.2 RSTP163.6 | length 563.1
  Top Layer w10: ROUTH3.2@1300,3125 1475,2950 1475,2800 1525,2750 RSTP163.6@1619.88,2750
ROUT34: ROUTH3.3 RSTP163.7 | length 712.7
  Top Layer w10: RSTP163.7@1619.88,2700 1693,2700 v1(1699,2706)
  Bottom Layer w10: ROUTH3.3@1200,3025 1250,2975 1430,2975 v1(1699,2706)
ROUT35: ROUTH3.4 RSTP163.8 | length 1991.9
  Top Layer w10: v1(1194,2215) 1560,2215 1700,2355 1700,2646.84 1696.84,2650 RSTP163.8@1619.88,2650
  Bottom Layer w10: v1(1194,2215) 1125.47,2283.53 1125.47,3025.47 1175,3075 1250,3075 ROUTH3.4@1300,3025
ROUT36: ROUTH3.5 RSTP163.9 | length 705.5
  Top Layer w10: ROUTH3.5@1200,2925 1250,2975 1368,2975 1424.96,2918.04 1424.96,2731.04 1556,2600 RSTP163.9@1619.88,2600
ROUT37: ROUTH3.6 RSTP163.10 | length 560.2
  Top Layer w10: ROUTH3.6@1300,2925 1397,2828 1397,2683 1530,2550 RSTP163.10@1619.88,2550
ROUT38: ROUTH3.7 RSTP163.11 | length 657
  Top Layer w10: ROUTH3.7@1200,2825 1250,2775 1250,2600 1275,2575 1374,2575 1449,2500 RSTP163.11@1619.88,2500
ROUT39: ROUTH3.8 RSTP163.12 | length 1319.7
  Top Layer w10: RSTP163.12@1619.88,2450 1650,2450 v1(1650,2378)
  Bottom Layer w10: ROUTH3.8@1300,2825 1469,2656 1749,2656 1793,2700 1901,2700 1926,2675 1926,2514.5 1856.5,2445 1717,2445 v1(1650,2378)
ROUT40: ROUTH3.9 RSTP163.13 | length 2151.6
  Top Layer w10: ROUTH3.9@1200,2725 1150.47,2774.53 1150.47,3175 1187.47,3212 v1(1458,3212) ; RSTP163.13@1980.12,2450 1996,2450 1996,2333 v1(1982,2319)
  Bottom Layer w10: v1(1458,3212) 1550,3120 1713,3120 1982,2851 v1(1982,2319)
ROUT41: ROUTH3.10 RSTP163.14 | length 1542.2
  Top Layer w10: v1(1896,2286) 1896,2475 1921,2500 RSTP163.14@1980.12,2500
  Bottom Layer w10: ROUTH3.10@1300,2725 1250,2675 1250,2365.61 1570.61,2045 1655,2045 v1(1896,2286)
ROUT42: ROUTH3.11 RSTP163.15 | length 3650.9
  Top Layer w10: ROUTH3.11@1200,2625 1144,2569 1144,1308 1233.62,1218.38 1966.38,1218.38 2071,1323 2071,2525 2046,2550 RSTP163.15@1980.12,2550
ROUT43: ROUTH3.12 RSTP163.16 | length 711.2
  Top Layer w10: v1(1876,2650) 1926,2600 RSTP163.16@1980.12,2600
  Bottom Layer w10: ROUTH3.12@1300,2625 1851,2625 v1(1876,2650)
ROUT44: ROUTH3.13 RSTP163.17 | length 2223.3
  Top Layer w10: RSTP163.17@1980.12,2650 2072,2650 2150,2572 2150,2178.48 2175,2153.48 v1(2175,1987)
  Bottom Layer w10: ROUTH3.13@1200,2525 1150.47,2475.47 1150.47,2333.28 1488.75,1995 1719,1995 1774,2050 1848,2050 1911,1987 v1(2175,1987)
ROUT45: ROUTH3.14 RSTP163.18 | length 881.9
  Top Layer w10: v1(1876,2575) 1826,2625 1826,2675 1851,2700 RSTP163.18@1980.12,2700
  Bottom Layer w10: ROUTH3.14@1300,2525 1350,2575 v1(1876,2575)
ROUT46: ROUTH3.15 RSTP163.19 | length 2336.4
  Top Layer w10: RSTP163.19@1980.12,2750 2078,2750 2175,2653 2175,2247 2225,2197 2225,1962 2200,1937 2150,1937 2123,1964 v1(2123,2045)
  Bottom Layer w10: ROUTH3.15@1200,2425 1200,2375 1555,2020 1687,2020 1778,2111 1879,2111 1945,2045 v1(2123,2045)
ROUT47: ROUTH3.16 RSTP163.20 | length 1000
  Top Layer w10: v1(1824,2495) 1801,2518 1801,2720.33 1880.67,2800 RSTP163.20@1980.12,2800
  Bottom Layer w10: ROUTH3.16@1300,2425 1370,2495 v1(1824,2495)
ROUT48: ROUTH4.1 RSTP164.5 | length 617.6
  Top Layer w10: ROUTH4.1@1200,2025 1250,1975 1356,1975 1467.3,1863.7 1467.3,1756.05 1523.35,1700 RSTP164.5@1619.88,1700
ROUT49: ROUTH4.2 RSTP164.6 | length 655.4
  Top Layer w10: RSTP164.6@1619.88,1650 1680,1650 v1(1710,1680)
  Bottom Layer w10: ROUTH4.2@1300,2025 1645,1680 v1(1710,1680)
ROUT50: ROUTH4.3 RSTP164.7 | length 605.5
  Top Layer w10: ROUTH4.3@1200,1925 1250,1875 1370,1875 1399.53,1845.47 1399.53,1758.47 1558,1600 RSTP164.7@1619.88,1600
ROUT51: ROUTH4.4 RSTP164.8 | length 558.4
  Top Layer w10: v1(1508,1575) 1533,1550 RSTP164.8@1619.88,1550
  Bottom Layer w10: ROUTH4.4@1300,1925 1508,1717 v1(1508,1575)
ROUT52: ROUTH4.5 RSTP164.9 | length 627.7
  Top Layer w10: ROUTH4.5@1200,1825 1250,1775 1325,1775 1400,1700 1400,1575 1475,1500 RSTP164.9@1619.88,1500
ROUT53: ROUTH4.6 RSTP164.10 | length 736.3
  Top Layer w10: v1(1444,1450) RSTP164.10@1619.88,1450
  Bottom Layer w10: ROUTH4.6@1300,1825 1250,1775 1250,1500 1275,1475 1419,1475 v1(1444,1450)
ROUT54: ROUTH4.7 RSTP164.11 | length 665.4
  Top Layer w10: ROUTH4.7@1200,1725 1250,1675 1324.53,1675 1374.53,1625 1374.53,1435.67 1410.2,1400 RSTP164.11@1619.88,1400
ROUT55: ROUTH4.8 RSTP164.12 | length 575.4
  Top Layer w10: v1(1519,1350) RSTP164.12@1619.88,1350
  Bottom Layer w10: ROUTH4.8@1300,1725 1452.54,1572.46 1452.54,1551.46 1479,1525 1494,1525 1519,1500 v1(1519,1350)
ROUT56: ROUTH4.9 RSTP164.13 | length 1117
  Top Layer w10: ROUTH4.9@1200,1625 1250,1575 1250,1300.47 1275.47,1275 1832.88,1275 1907.88,1350 RSTP164.13@1980.12,1350
ROUT57: ROUTH4.10 RSTP164.14 | length 988.2
  Top Layer w10: ROUTH4.10@1300,1625 1349.53,1575.47 1349.53,1350 1399.53,1300 1820,1300 1920,1400 RSTP164.14@1980.12,1400
ROUT58: ROUTH4.11 RSTP164.15 | length 2790.9
  Top Layer w10: v1(1890,1444) 1896,1450 RSTP164.15@1980.12,1450
  Bottom Layer w10: ROUTH4.11@1200,1525 1018,1343 1018,1034 1050,1002 1832,1002 2046,1216 2046,1650 1996,1700 1865,1700 1840,1675 1840,1625 1865,1600 1921,1600 1946,1575 1946,1500 v1(1890,1444)
ROUT59: ROUTH4.12 RSTP164.16 | length 1019.5
  Top Layer w10: v1(1718,1356) 1862,1500 RSTP164.16@1980.12,1500
  Bottom Layer w10: ROUTH4.12@1300,1525 1325,1500 1469,1500 1494,1475 1494,1412.5 1468,1386.5 1468,1300 1497,1271 1633,1271 v1(1718,1356)
ROUT60: ROUTH4.13 RSTP164.17 | length 1254.7
  Top Layer w10: v1(1896,1550) RSTP164.17@1980.12,1550
  Bottom Layer w10: ROUTH4.13@1200,1425 1250,1375 1250,1246 1300,1196 1811,1196 1840,1225 1840,1494 v1(1896,1550)
ROUT61: ROUTH4.14 RSTP164.18 | length 1055.2
  Top Layer w10: v1(1743,1503) 1840,1600 RSTP164.18@1980.12,1600
  Bottom Layer w10: ROUTH4.14@1300,1425 1479,1246 1714,1246 1768,1300 1768,1478 v1(1743,1503)
ROUT62: ROUTH4.15 RSTP164.19 | length 1537.7
  Top Layer w10: v1(1898,1650) RSTP164.19@1980.12,1650
  Bottom Layer w10: ROUTH4.15@1200,1325 1200,1169.35 1250,1119.35 1865.35,1119.35 1971,1225 1971,1600 1946,1625 v1(1898,1650)
ROUT63: ROUTH4.16 RSTP164.20 | length 1202.3
  Top Layer w10: v1(1790,1700) RSTP164.20@1980.12,1700
  Bottom Layer w10: ROUTH4.16@1300,1325 1404,1221 1754.9,1221 1815,1281.1 1815,1675 v1(1790,1700)
pads on no net: "Terminal Block.2" BSTP164.22 GSTP164.22 RSTP164.22

## Polygon pours and split planes (outlines as drawn)
GND on Bottom Layer "Multi-Layer-No Net" (solid, remove dead copper, shelved, pour order 6): 950,6050 4550,6050 4550,950 950,950 950,6050
GND on Bottom Layer "Multi-Layer-No Net" (solid, remove dead copper, shelved, pour order 4): 1000,6000 4500,6000 4500,1000 1000,1000 1000,6000
GND on Bottom Layer "Multi-Layer-No Net" (solid, remove dead copper, pour order 6): 950,950 950,6050 4550,6050 4550,950 950,950

## Keep-outs
Keep-Out Layer:
  the board outline again, w10

## Other copper
Top Layer:
  text "SPI Driver Board V 2.1" at 2100,1050 h60

## Text inside footprints (layer, text, board x,y; h text height)
BOUTH1: Top Overlay "2" at 3480,5425 h50 r270; Top Overlay "1" at 3380,5425 h50 r270; Top Overlay "15" at 3380,4565 h50 r270; Top Overlay "16" at 3480,4565 h50 r270
BOUTH2: Top Overlay "2" at 3480,4325 h50 r270; Top Overlay "1" at 3380,4325 h50 r270; Top Overlay "15" at 3380,3465 h50 r270; Top Overlay "16" at 3480,3465 h50 r270
BOUTH3: Top Overlay "2" at 3480,3225 h50 r270; Top Overlay "1" at 3380,3225 h50 r270; Top Overlay "15" at 3380,2365 h50 r270; Top Overlay "16" at 3480,2365 h50 r270
BOUTH4: Top Overlay "2" at 3480,2125 h50 r270; Top Overlay "1" at 3380,2125 h50 r270; Top Overlay "15" at 3380,1265 h50 r270; Top Overlay "16" at 3480,1265 h50 r270
GOUTH1: Top Overlay "2" at 2380,5425 h50 r270; Top Overlay "1" at 2280,5425 h50 r270; Top Overlay "15" at 2280,4565 h50 r270; Top Overlay "16" at 2380,4565 h50 r270
GOUTH2: Top Overlay "2" at 2380,4325 h50 r270; Top Overlay "1" at 2280,4325 h50 r270; Top Overlay "15" at 2280,3465 h50 r270; Top Overlay "16" at 2380,3465 h50 r270
GOUTH3: Top Overlay "2" at 2380,3225 h50 r270; Top Overlay "1" at 2280,3225 h50 r270; Top Overlay "15" at 2280,2365 h50 r270; Top Overlay "16" at 2380,2365 h50 r270
GOUTH4: Top Overlay "2" at 2380,2125 h50 r270; Top Overlay "1" at 2280,2125 h50 r270; Top Overlay "15" at 2280,1265 h50 r270; Top Overlay "16" at 2380,1265 h50 r270
ROUTH1: Top Overlay "2" at 1280,5425 h50 r270; Top Overlay "1" at 1180,5425 h50 r270; Top Overlay "15" at 1180,4565 h50 r270; Top Overlay "16" at 1280,4565 h50 r270
ROUTH2: Top Overlay "2" at 1280,4325 h50 r270; Top Overlay "1" at 1180,4325 h50 r270; Top Overlay "15" at 1180,3465 h50 r270; Top Overlay "16" at 1280,3465 h50 r270
ROUTH3: Top Overlay "2" at 1280,3225 h50 r270; Top Overlay "1" at 1180,3225 h50 r270; Top Overlay "15" at 1180,2365 h50 r270; Top Overlay "16" at 1280,2365 h50 r270
ROUTH4: Top Overlay "2" at 1280,2125 h50 r270; Top Overlay "1" at 1180,2125 h50 r270; Top Overlay "15" at 1180,1265 h50 r270; Top Overlay "16" at 1280,1265 h50 r270
SPICOM: Top Overlay "1" at 2230,5920 h50 r180; Top Overlay "2" at 2250,5820 h50 r180; Top Overlay "5" at 1890,5920 h50 r180; Top Overlay "6" at 1890,5820 h50 r180